# EAGLE board simpleOscOne3 (EAGLE 7.7.0)
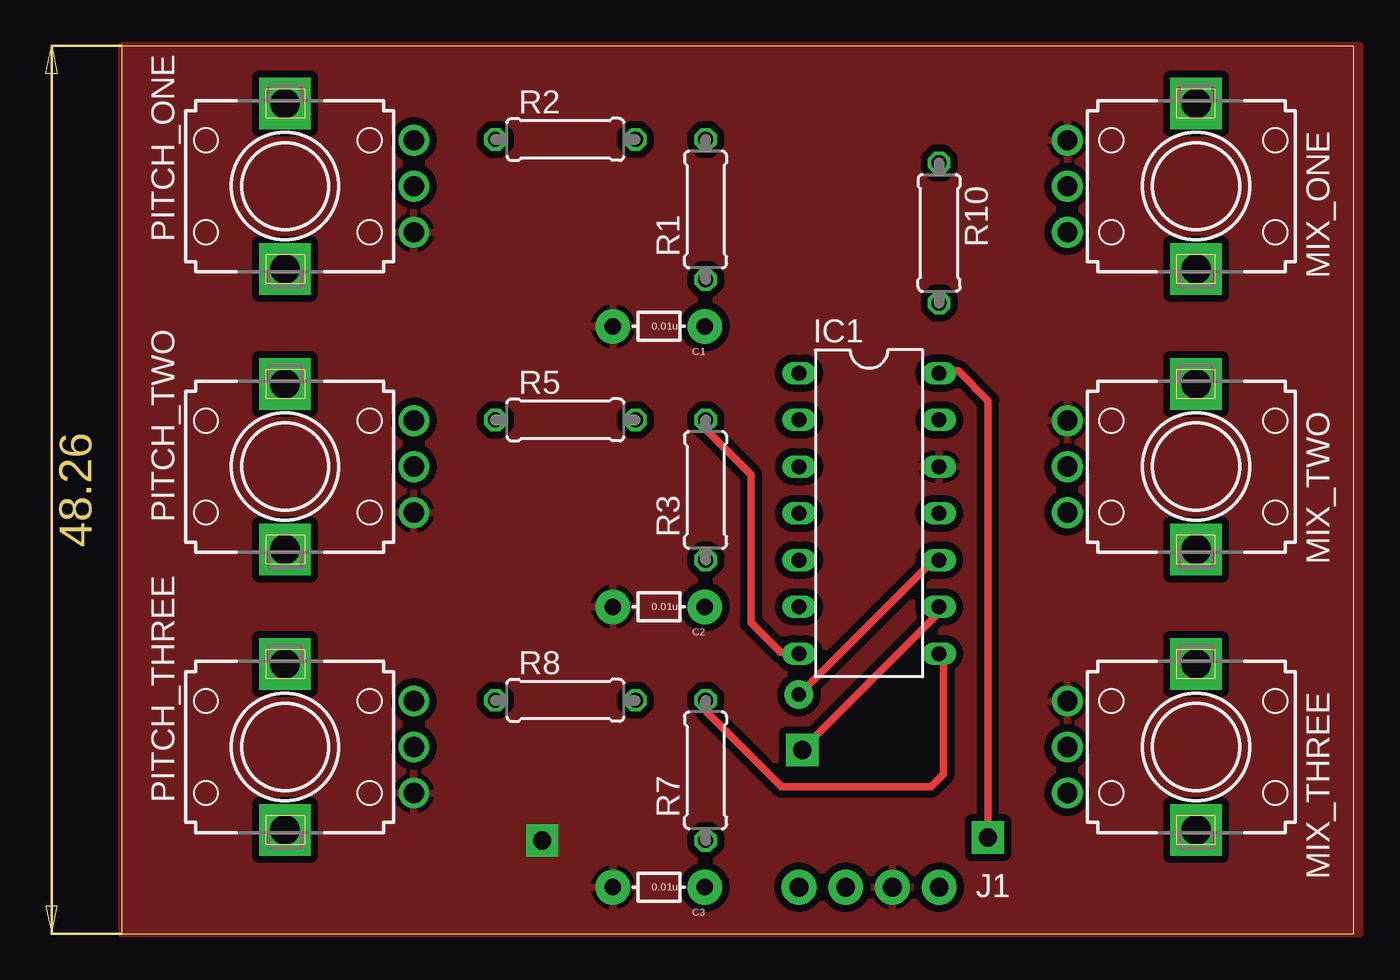
[diagram p0: board, top side]
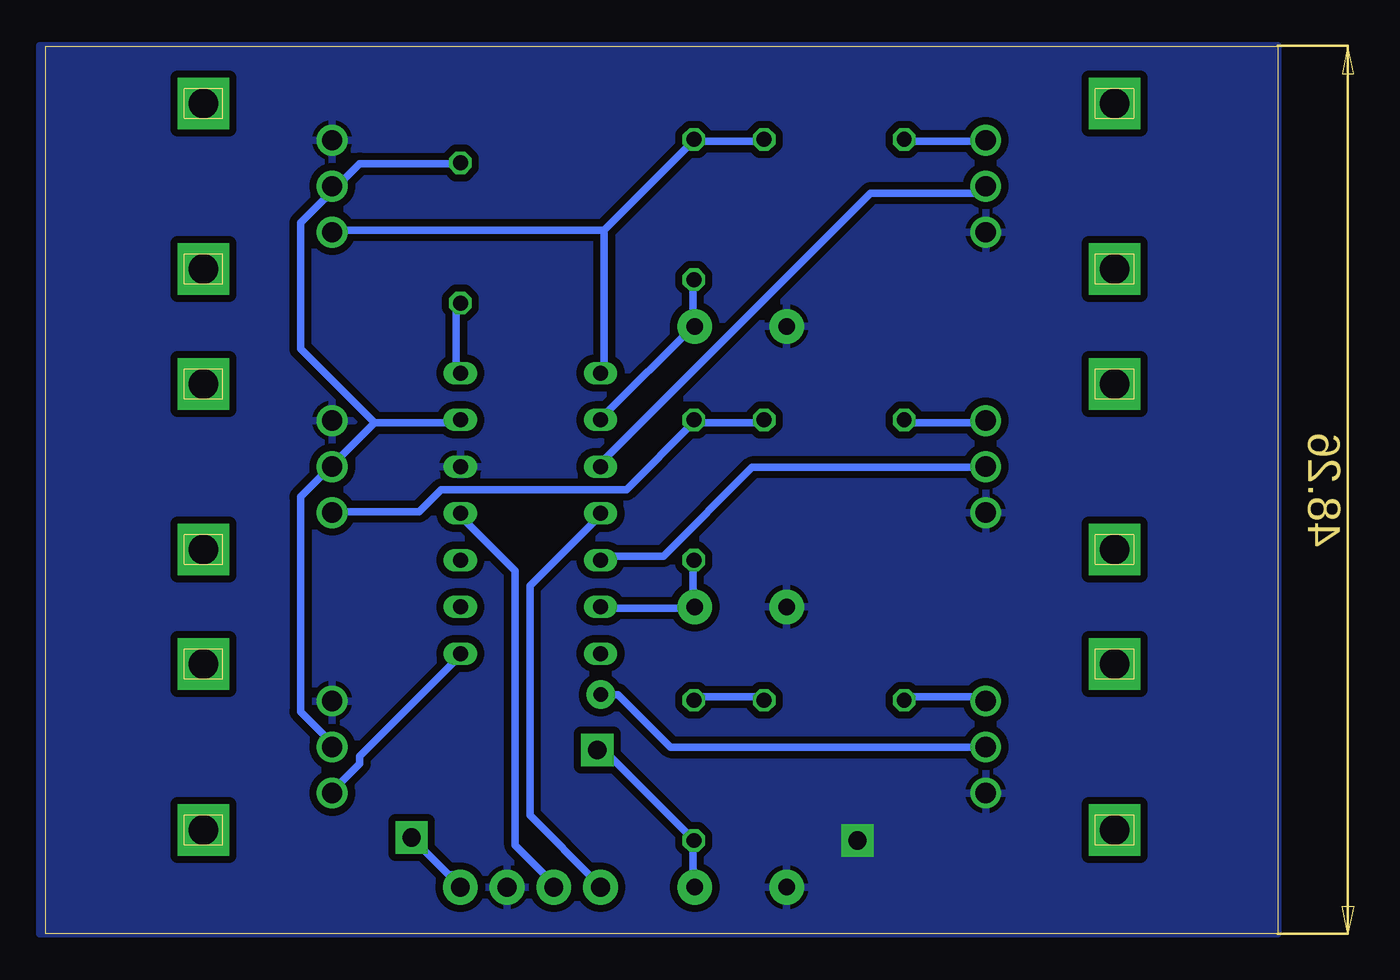
[diagram p1: board, bottom side, seen from below]

Size 66.98 x 48.25 mm. Coordinates in mm from the lower left corner, seen from the top.
Outline: 0,0 66.98,0 66.98,48.25 0,48.25 0,0
Copper layers (1*16): Top 0.035mm / dielectric 1.5mm / Bottom 0.035mm
Design rules "OthermillDRC_1_64_v2 *": minimum track width 16mil, minimum drill 31mil, track to track 0.39878125mm, track to pad 0.39878125mm, pad to pad 0.39878125mm, via to via 0.39878125mm, smd to smd 0mil, copper to edge 0mil, drill to drill 1mil, minimum pad ring 0mil, minimum via ring 15mil, stop-mask expansion 1mil, vias tented up to drill 30mil, thermal gap 10mil
Net classes: 0 default: width 0.406 mm, clearance 0.305 mm

## Footprints (pad centres in the part's own frame; a part is rotated, then mirrored left to right if it is on the bottom)
AXIAL-5MM = drill 0.9 pad 1.88: P$1 -2.5,0; P$2 2.5,0
DIL14 = drill 0.813 long: 1 -7.62,-3.81; 2 -5.08,-3.81; 3 -2.54,-3.81; 4 0,-3.81; 5 2.54,-3.81; 6 5.08,-3.81; 7 7.62,-3.81; 8 7.62,3.81; 9 5.08,3.81; 10 2.54,3.81; 11 0,3.81; 12 -2.54,3.81; 13 -5.08,3.81; 14 -7.62,3.81
1X04_NO_SILK_ALL_ROUND = drill 1.016 pad 1.88: 1 0,0; 2 2.54,0; 3 5.08,0; 4 7.62,0
EVUF = drill 1.1 pad 1.676: 1 -2.5,-7; 2 0,-7; 3 2.5,-7 | drill 1.6 pad 2.8 square: M1 4.5,0; M2 -4.5,0
0207/7 = drill 0.813 octagon: 1 -3.81,0; 2 3.81,0

## Placement (x,y rotation side)
C1  0.01u  [AXIAL-5MM]  29.21,33.02 180 top
C2  0.01u  [AXIAL-5MM]  29.21,17.78 180 top
C3  0.01u  [AXIAL-5MM]  29.21,2.54 180 top
FRAME1  FRAME-LETTERNO_PACKAGE  [DUMMY]  -49.53,-90.17 0 top  (outside the outline)
IC1  TL084P  [DIL14]  40.64,22.86 270 top
J1  [1X04_NO_SILK_ALL_ROUND]  44.45,2.54 180 top
MIX_ONE  US-EVUF2A  [EVUF]  58.42,40.64 270 top
MIX_THREE  US-EVUF2A  [EVUF]  58.42,10.16 270 top
MIX_TWO  US-EVUF2A  [EVUF]  58.42,25.4 270 top
PITCH_ONE  US-EVUF2A  [EVUF]  8.89,40.64 90 top
PITCH_THREE  US-EVUF2A  [EVUF]  8.89,10.16 90 top
PITCH_TWO  US-EVUF2A  [EVUF]  8.89,25.4 90 top
R1  10k  [0207/7]  31.75,39.37 90 top
R2  10k  [0207/7]  24.13,43.18 0 top
R3  10k  [0207/7]  31.75,24.13 90 top
R5  10k  [0207/7]  24.13,27.94 0 top
R7  10k  [0207/7]  31.75,8.89 90 top
R8  10k  [0207/7]  24.13,12.7 0 top
R10  10k  [0207/7]  44.45,38.1 270 top

## Library data of the parts
C1-C3 = SparkFun-Capacitors
FRAME1 = SparkFun-Aesthetics; DESIGNER: Nobody; VERSION: v01
IC1 = linear
J1 = SparkFun-Connectors; PROD_ID: CONN-09696
MIX_ONE MIX_THREE MIX_TWO PITCH_ONE PITCH_THREE PITCH_TWO = pot
R1-R3 R5 R7 R8 R10 = adafruit

## Nets
GND: C1.P$2 C2.P$2 C3.P$2 IC1.12 J1.2 MIX_ONE.1 MIX_THREE.1 MIX_TWO.1 PITCH_ONE.1 PITCH_THREE.1 PITCH_TWO.1
N$1: PITCH_ONE.3 R2.1
N$2: IC1.1 MIX_ONE.3 R1.2 R2.2
N$3: IC1.7 MIX_TWO.3 R3.2 R5.2
N$4: IC1.3 PITCH_ONE.2
N$5: C1.P$1 IC1.2 R1.1
N$6: PITCH_TWO.3 R5.1
N$7: IC1.5 PITCH_TWO.2
N$8: C2.P$1 IC1.6 R3.1
N$9: IC1.8 MIX_THREE.3 R7.2 R8.2
N$10: PITCH_THREE.3 R8.1
N$11: IC1.10 PITCH_THREE.2
N$12: C3.P$1 IC1.9 R7.1
N$14: IC1.13 MIX_ONE.2 MIX_THREE.2 MIX_TWO.2 R10.1
OUTPUT: IC1.14 J1.1 R10.2
VCC: IC1.4 J1.4
VDD: IC1.11 J1.3

## Tracks (layer width: path | path; a pad name or v marks a point on that pad's centre or on a via)
GND  (via drill 1)
  other vias: 22.86,5.08
  pour Top: 0,48.26 67.31,48.26 67.31,0 0,0
  pour Bottom: 0,48.26 67.31,48.26 67.31,0 0,0
N$1
  Bottom 0.406: R2.1 20.13,43.08 16.1,43.08 PITCH_ONE.3
N$2
  Bottom 0.406: R2.2 28.18,43.08 31.4,43.08 R1.2 31.8,43.08 36.64,38.25 | 36.64,38.25 36.64,30.6 IC1.1 | 36.64,38.25 51.13,38.25 MIX_ONE.3
N$3
  Top 0.406: IC1.7 36.64,15.3 35.83,15.3 34.22,16.91 34.22,24.96 31.4,27.78 R3.2
  Bottom 0.406: R5.2 28.18,27.78 31.4,27.78 R3.2 31.8,27.78 35.43,24.16 45.49,24.16 46.7,22.95 51.13,22.95 MIX_TWO.3
N$4
  Bottom 0.406: IC1.3 36.64,25.77 22.14,40.26 16.1,40.26 PITCH_ONE.2
N$5
  Bottom 0.406: IC1.2 36.64,28.18 31.8,33.01 C1.P$1 31.8,33.41 31.8,35.43 R1.1
N$6
  Bottom 0.406: R5.1 20.13,27.78 16.1,27.78 PITCH_TWO.3
N$7
  Bottom 0.406: IC1.5 36.64,20.53 33.41,20.53 28.58,25.36 16.1,25.36 PITCH_TWO.2
N$8
  Bottom 0.406: R3.1 31.8,20.13 31.8,18.12 C2.P$1 31.8,17.71 36.64,17.71 IC1.6
N$9
  Top 0.406: R7.2 31.8,12.48 31.8,12.08 35.88,8 44,8 44.69,8.69 44.69,14.9 IC1.8
  Bottom 0.406: R8.2 28.18,12.88 31.4,12.88 R7.2 | IC1.8 44.69,14.9 49.92,9.66 49.92,9.26 51.13,8.05 MIX_THREE.3
N$10
  Bottom 0.406: R8.1 20.13,12.88 16.1,12.88 PITCH_THREE.3
N$11  (via drill 0.79)
  Top 0.406: IC1.10 44.28,20.13 43.95,20.13 v36.83,13.01
  Bottom 0.406: 16.1,10.47 PITCH_THREE.2 33.02,10.16 35.87,13.01 v36.83,13.01
N$12  (via drill 1)
  Top 0.406: IC1.9 44.45,17.45 v37,10
  Bottom 0.406: C3.P$1 31.8,2.82 31.8,4.83 R7.1 36.67,10 v37,10
N$14
  Bottom 0.406: R10.1 44.69,41.87 49.92,41.87 51.13,40.66 MIX_ONE.2 51.53,40.26 53.14,38.65 53.14,31.8 49.12,27.78 | 49.12,27.78 44.69,27.78 IC1.13 | 49.12,27.78 51.13,25.77 MIX_TWO.2 51.53,25.36 53.14,23.75 53.14,12.08 51.53,10.47 MIX_THREE.2
OUTPUT  (via drill 1)
  Top 0.406: v47.1,5.23 47.1,28.99 45.49,30.6 44.69,30.6 IC1.14
  Bottom 0.406: IC1.14 44.69,30.6 44.69,34.22 R10.2 | v47.1,5.23 45.09,3.22 44.69,3.22 44.28,2.82 J1.1
VCC
  Bottom 0.406: IC1.4 37.04,22.55 40.66,18.92 40.66,6.44 37.04,2.82 J1.4
VDD
  Bottom 0.406: IC1.11 44.28,22.55 41.47,19.73 41.47,4.83 39.45,2.82 J1.3